# Altium PCB CC2530.PcbDoc
Units mil, origin at the board's own origin, x right, y up, seen from the top; angles counter-clockwise.
Board outline 1035 x 1425 mil, 2 copper layers (Top Layer, Bottom Layer); 29 components, 35 nets, 122 pads, 56 vias.
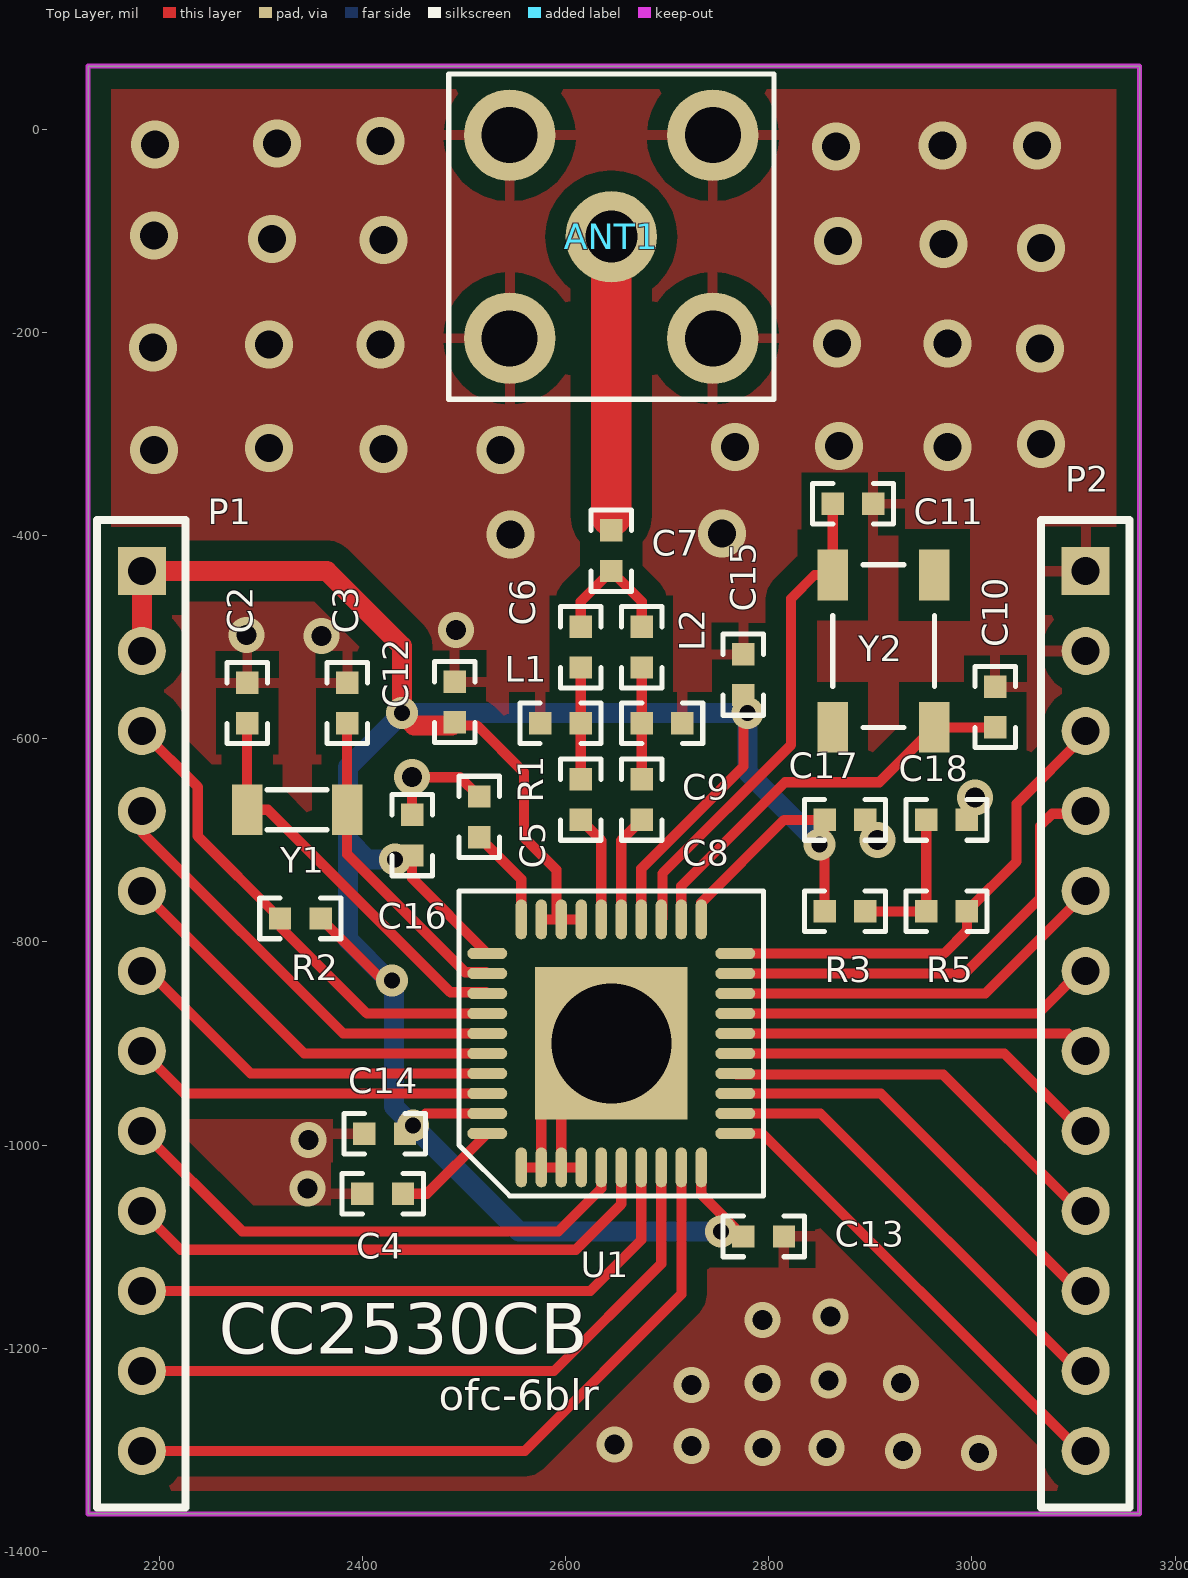
[diagram p0: Top Layer view]
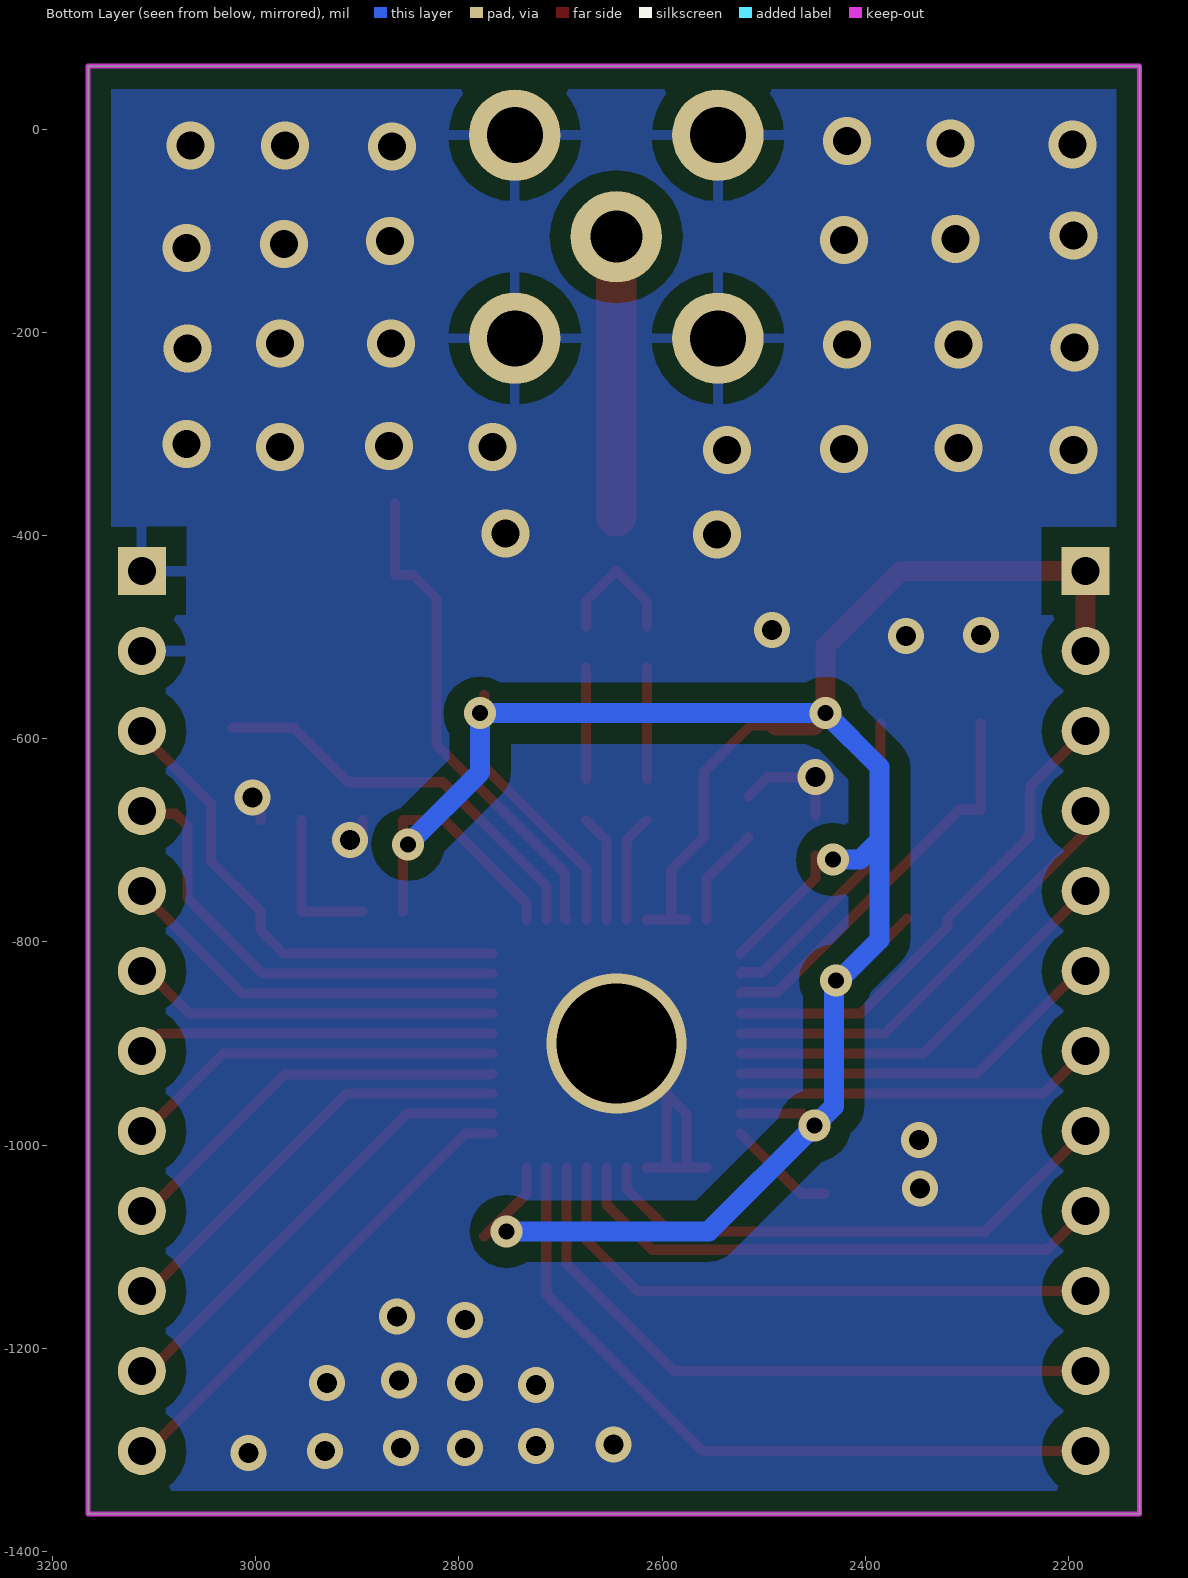
[diagram p1: Bottom Layer view, seen from below]

## Layer stack, top to bottom
Top Layer: signal copper 1.4
Dielectric: dielectric 12.6, FR-4, Dk 4.8
Bottom Layer: signal copper 1.4

## Board outline
2130,62 2130,-1363 3165,-1363 3165,62 2130,62

## Design rules (kind name [scope] priority, off if disabled: settings)
Clearance Ploy [InPolygon] p1: gap=20
Clearance [All] p2: gap=8
HoleSize [All] p1: absolutevalues=TRUE maxlimit=200 minlimit=8 maxpercent=80.000 minpercent=20.000
MinimumSolderMaskSliver [All] p1 off: minsoldermaskwidth=8
PlaneConnect [All] p1: planeconnectstyle=Relief reliefexpansion=10 reliefentries=4 reliefconductorwidth=10 reliefairgap=10
PolygonConnect GND-Via [IsVia] p1: connectstyle=Direct reliefconductorwidth=10 reliefentries=4 polygonreliefangle="90 Angle"
PolygonConnect [All] p2: connectstyle=Relief reliefconductorwidth=10 reliefentries=4 polygonreliefangle="90 Angle"
RoutingVias [All] p1: holewidth=28 width=40 viastyle="Through Hole" minholewidth=8 minwidth=10 maxholewidth=160 maxwidth=200
ShortCircuit ANT [InNet('NetANT2_1')] p1: allowed=TRUE
ShortCircuit [All] p2 off: allowed=TRUE
SilkscreenOverComponentPads [All] p1 off: minsilkscreentomaskgap=10
SolderMaskExpansion [All] p1: expansion=4
TestPointUsage [All] p1: valid=0 allowmultiple=FALSE
Testpoint [All] p1: side=15 testpointundercomponent=TRUE minsize=40 maxsize=100 preferedsize=60 minholesize=0 maxholesize=40 preferedholesize=32 testpointgrid=1 style=1023 order=0123456789
Width [All] p1: maxlimit=40 minlimit=8 preferedwidth=10
19 further rules are at their usual default settings.

## Components (designator, comment, footprint, x,y, rotation, side; value= is the part's Value field where it differs from the comment)
ANT1 "ANT" ANT 2645,-106 r0 top
C2 "C_0402" M_0402 2286.57,-585 r90 top
C3 "C_0402" M_0402 2385,-585 r90 top
C4 "C_0603" M_0402 2440,-1048 r180 top
C5 "C_0402" M_0402 2615,-680 r90 top
C6 "C_0402" M_0402 2615,-530 r90 top
C7 "C_0402" M_0402 2645,-435 r90 top
C8 "C_0402" M_0402 2675,-680 r90 top
C9 "C_0402" M_0402 2715,-585 r180 top
C10 "C_0402" M_0402 3022.95,-548.9 r270 top
C11 "C_0402" M_0402 2902.95,-368.9 r180 top
C12 "C_0805" M_0402 2491,-544 r270 top
C13 "C_0805" M_0402 2815,-1090 r180 top
C14 "C_0805" M_0402 2402,-989 r0 top
C15 "C_0805" M_0402 2775,-517 r270 top
C16 "C_0805" M_0402 2449,-675 r270 top
C17 "C_0805" M_0402 2895,-680 r180 top
C18 "C_0805" M_0402 2995,-680 r180 top
L1 "L_0402" M_0402 2615,-585 r180 top
L2 "L_0402" M_0402 2675,-530 r90 top
P1 "Header 12" Header-2.0 2182,-435 r0 top
P2 "Header 12" Header-2.0 3111,-435 r0 top
R1 "R_0402" M_0402 2515,-697 r90 top
R2 "R_0805" M_0402 2319,-777 r0 top
R3 "R_0805" M_0402 2895,-770 r180 top
R5 "R_0805" M_0402 2955,-770 r0 top
U1 "CC2530" QFN40 2645,-900 r0 top locked
Y1 "32k" XTAL_32K_2P 2286.57,-670 r0 top
Y2 "32M" XTAL_32M_SMD 2962.95,-588.9 r90 top

## Footprints (in the part's own frame and the unit in brackets; to place one, negate y for a bottom-side part, rotate by r counter-clockwise, add the part's x,y. Pads: shape width x height; smd on the part's side, far side on the other; paste and mask are expansions set on the pad)
ANT [mil]
  round 90 hole 51.18: 1(0,0)
  round 90 hole 55.12: 2(-100,-100) 2(-100,100) 2(100,-100) 2(100,100)
  silkscreen extent -160,-160 160,160
Header-2.0 [mm]
  rect 1.2x1.2 hole 0.7: 1(0.025,0)
  round 1.2 hole 0.7: 2(0.025,-2) 3(0.025,-4) 4(0.025,-6) 5(0.025,-8) 6(0.025,-10) 7(0.025,-12) 8(0.025,-14) 9(0.025,-16) 10(0.025,-18) 11(0.025,-20) 12(0.025,-22)
  silkscreen extent -1.09,-23.42 1.12,1.27
M_0402 [mil]
  rect 22x22 smd: 1(0,0) 2(40,0)
  silkscreen extent -20,-20 60,20
QFN40 [mm]
  oval 0.28x1 smd: 1(-2.25,-3.1) 2(-1.75,-3.1) 3(-1.25,-3.1) 4(-0.75,-3.1) 5(-0.25,-3.1) 6(0.25,-3.1) 7(0.75,-3.1) 8(1.25,-3.1) 9(1.75,-3.1) 10(2.25,-3.1) 21(2.25,3.1) 22(1.75,3.1) 23(1.25,3.1) 24(0.75,3.1) 25(0.25,3.1) 26(-0.25,3.1) 27(-0.75,3.1) 28(-1.25,3.1) 29(-1.75,3.1) 30(-2.25,3.1)
  oval 1x0.28 smd: 11(3.1,-2.25) 12(3.1,-1.75) 13(3.1,-1.25) 14(3.1,-0.75) 15(3.1,-0.25) 16(3.1,0.25) 17(3.1,0.75) 18(3.1,1.25) 19(3.1,1.75) 20(3.1,2.25) 31(-3.1,2.25) 32(-3.1,1.75) 33(-3.1,1.25) 34(-3.1,0.75) 35(-3.1,0.25) 36(-3.1,-0.25) 37(-3.1,-0.75) 38(-3.1,-1.25) 39(-3.1,-1.75) 40(-3.1,-2.25)
  rect 3.81x3.81 smd: 41(0,0)
  silkscreen extent -3.81,-3.81 3.81,3.81
XTAL_32K_2P [mil]
  rect 30x50 smd: 1(0,0) 2(98.43,0)
  silkscreen extent 20,-20 79,20
XTAL_32M_SMD [mil]
  rect 50x30 smd: 0(0,100) 0(150,0) 1(0,0) 2(150,100)
  silkscreen extent 0,0 160,100

## Part data
C2 C3 C4 C10 C11: library part C_0805
P1 P2: "Header, 12-Pin"
R1: library part R_0805
Y1: library part X_32K_2P
Y2: library part X_32M_SMD

## Via types
v1: diameter 47.24, hole 27.56, Top Layer to Bottom Layer, 28 vias
v2: diameter 35.43, hole 19.68, Top Layer to Bottom Layer, 20 vias
v3: diameter 31.5, hole 15.75, Top Layer to Bottom Layer, 7 vias
v4: diameter 137.8, hole 118.11, Top Layer to Bottom Layer, tented both sides, 1 vias

## Nets (pads, with @x,y where several pads share a name; then routed paths per layer and width w, separated by ;. In a path a pad name is that pad's centre, name@x,y a point inside that pad or via, vN(x,y) a via of type N, cw(c..) or ccw(c..) an arc to the next point about the centre after c; other vN are vias at no path point)
GND: ANT1.2 C2.2 C3.2 C4.2 C9.1 C10.1 C11.1 C12.1 C13.1 C14.1 C15.1 C16.1 C17.1 C18.1 L1.2 P2.1 P2.2 R1.2 U1.1 U1.2 U1.3 U1.4 U1.41 | length 513.2
  Top Layer w10: C16.1 v2(2449,-638) 2496,-638 R1.2 ; U1.1 U1.2 ; U1.4 U1.3 ; C17.1 2895,-688 v2(2907,-700) ; C18.1 2995,-666 v2(3003,-658) ; U1.2 2576.1,-968.9 v4(2645,-900) 2595.79,-949.21 U1.3 ; U1.2 U1.3
  other v1: 2546,-399 2754,-398 2195,-316 2536,-316 2421,-315 2308,-314 2767,-313 2976,-313 2869,-312 3068,-310 3067,-216 2194,-215 2308,-212 2418,-212 2867,-211 2976,-211 3068,-117 2972,-113 2868,-110 2421,-109 2311,-108 2195,-105 2866,-17 2971,-16 3064,-16 2196,-15 2316,-14 2418,-12
  other v2: 3007,-1303 2932,-1301 2794,-1298 2857,-1298 2724,-1296 2648,-1295 2724,-1236 2794,-1234 2930,-1234 2859,-1232 2794,-1172 2861,-1169 2346,-1043 2347,-995 2360,-499 2286,-498 2492,-493
NetANT1_1: ANT1.1 C7.2 | length 289
  Top Layer w10: C7.2 2645,-381
  Top Layer w40: 2645,-381 ANT1.1
NetC2_1: C2.1 U1.33 Y1.1 | length 396.3
  Top Layer w10: C2.1 Y1.1 2307,-670 2486.61,-849.61 2521.78,-849.61 U1.33
NetC3_1: C3.1 U1.32 Y1.2 | length 315.4
  Top Layer w10: C3.1 Y1.2 2385,-713.82 2501.11,-829.93 2521.78,-829.93 U1.32
NetC4_1: C4.1 U1.40 | length 107.6
  Top Layer w10: C4.1 2463.54,-1048 U1.40
NetC5_1: C5.1 U1.26 | length 106.3
  Top Layer w10: C5.1 2635.16,-700.16 U1.26
NetC5_2: C5.2 C6.1 L1.1 | length 110
  Top Layer w10: C5.2 L1.1 C6.1
NetC6_2: C6.2 C7.1 L2.2 | length 134.9
  Top Layer w10: C6.2 2615,-465 C7.1 2675,-465 L2.2
NetC8_1: C8.1 U1.25 | length 106.3
  Top Layer w10: U1.25 2654.84,-700.16 C8.1
NetC8_2: C8.2 C9.2 L2.1 | length 110
  Top Layer w10: C8.2 C9.2 L2.1
NetC10_2: C10.2 U1.22 Y2.1 | length 406.6
  Top Layer w10: U1.22 2713.9,-745.1 2816,-643 2908.85,-643 Y2.1 C10.2
NetC11_2: C11.2 U1.23 Y2.2 | length 489.4
  Top Layer w10: U1.23 2695.39,-776.78 2695.39,-732.61 2822,-606 2822,-462 2845.1,-438.9 Y2.2 C11.2
NetC18_2: C18.2 R3.1 R5.1 | length 150
  Top Layer w10: R3.1 R5.1 C18.2
NetR1_1: R1.1 U1.30 | length 98.1
  Top Layer w10: R1.1 2556.42,-738.42 U1.30
NRST: P2.3 R5.2 U1.20 | length 487.2
  Top Layer w10: U1.20 2972.58,-811.42 2995,-789 R5.2 3044,-721 3044,-664 3112,-596 P2.3@3112,-587.48
P00: P2.4 U1.19 | length 454.8
  Top Layer w10: U1.19 2992.9,-831.1 3067,-757 3067,-686 3079,-674 3104.22,-674 P2.4@3112,-666.22
P01: P2.5 U1.18 | length 392.9
  Top Layer w10: U1.18 3013.21,-850.79 3112,-752 P2.5@3112,-744.96
P02: P2.6 U1.17 | length 364.3
  Top Layer w10: U1.17 3065.23,-870.47 P2.6@3112,-823.7
P03: P2.7 U1.16 | length 352.1
  Top Layer w10: U1.16 3094.72,-890.16 P2.7
P04: P2.8 U1.15 | length 374.5
  Top Layer w10: U1.15 3031.84,-909.84 3103.18,-981.18 P2.8@3112,-981.18
P05: P2.9 U1.14 | length 399
  Top Layer w10: U1.14 2768.22,-930.7 2971.7,-930.7 3100.92,-1059.92 P2.9@3112,-1059.92
P06: P2.10 U1.13 | length 423.4
  Top Layer w10: U1.13 2910.21,-949.21 3099.66,-1138.66 P2.10@3112,-1138.66
P07: P2.11 U1.12 | length 447.9
  Top Layer w10: U1.12 2850.9,-968.9 3099.4,-1217.4 P2.11@3112,-1217.4
P10: P2.12 U1.11 | length 472.3
  Top Layer w10: U1.11 2793.58,-988.58 3101.14,-1296.14 P2.12@3112,-1296.14
P11: P1.12 U1.9 | length 719.8
  Top Layer w10: P1.12 2559.86,-1301.14 2714,-1147 2714,-1022.15 U1.9
P12: P1.11 U1.8 | length 649.7
  Top Layer w10: P1.11 2588.6,-1222.4 2694.21,-1116.79 U1.8
P13: P1.10 U1.7 | length 583.7
  Top Layer w10: P1.10 2624.34,-1143.66 2674.53,-1093.47 U1.7
P14: P1.9 U1.6 | length 542.3
  Top Layer w10: P1.9 2221.08,-1103 2610,-1103 2654.84,-1058.16 U1.6
P15: P1.8 U1.5 | length 531.3
  Top Layer w10: P1.8 2281.82,-1085 2593,-1085 2635.16,-1042.84 U1.5
P16: P1.7 U1.38 | length 357.3
  Top Layer w10: P1.7 2224.77,-949.21 U1.38
P17: P1.6 U1.37 | length 381.7
  Top Layer w10: P1.6 2189.17,-828.7 2290,-929.53 U1.37
P20: P1.5 U1.36 | length 406.2
  Top Layer w10: P1.5 2342.88,-909.84 U1.36
P21: P1.4 U1.35 | length 442.8
  Top Layer w10: P1.4 2183,-692 2381.16,-890.16 U1.35
P22: P1.3 R2.1 U1.34 | length 488.2
  Top Layer w10: P1.3 2238,-647.48 2238,-696 R2.1 2319,-785 2404.47,-870.47 U1.34
V3.3: C12.2 C13.2 C14.2 C15.2 C16.2 C17.2 P1.1 P1.2 R2.2 R3.2 U1.10 U1.21 U1.24 U1.27 U1.28 U1.29 U1.31 U1.39 | length 3085.3
  Top Layer w10: R2.2 2420,-838 v3(2429,-838) ; C14.2 v3(2450,-981) 2462.1,-968.9 U1.39 ; C16.2@2446,-718 C16.2 2449,-737.46 U1.31 ; C12.2@2484,-591 C12.2 2494,-587 2513,-587 2559,-633 2559,-697 2591,-729 2591,-773.17 U1.28 ; U1.29 U1.28 ; U1.27 U1.28 ; U1.24 2674.53,-728.02 2775,-627.54 C15.2 ; U1.10 2733.58,-1048.58 C13.2@2770,-1085 ; U1.21 2733.58,-761.42 2815,-680 C17.2 R3.2 ; v3(2753,-1085) C13.2@2770,-1085 ; C13.2 C13.2@2770,-1085
  Top Layer w19.68: P1.2 P1.1 2365,-435 2439,-509 v3(2439,-575) 2451,-587 2488,-587 C12.2
  Bottom Layer w19.68: v3(2432,-719) 2405,-719 2386,-700 ; v3(2753,-1085) 2554,-1085 v3(2450,-981) 2431,-962 2431,-838 v3(2429,-838) 2426,-838 2386,-798 2386,-700 ; v3(2850,-704) 2779,-633 v3(2779,-575) v3(2439,-575) 2386,-628 2386,-700
pads on no net: Y2.0

## Polygon pours and split planes (outlines as drawn)
GND on Top Layer "Top Layer-No Net" (solid, remove dead copper, pour order 1000): 2130,-1363 3165,-1363 3165,62 2130,62 2130,-1363
GND on Bottom Layer "Top Layer-No Net" (solid, remove dead copper, pour order 1001): 2130,62 2130,-1363 3165,-1363 3165,62 2130,62

## Keep-outs
Keep-Out Layer:
  the board outline again, w5

## Silkscreen, mask and mechanical layers (free items; w line width, h text height)
Top Overlay:
  text "CC2530CB" at 2258.45,-1205.55 h50
  text "ofc-6blr" at 2475,-1261 h30